# EAGLE board motion_sensor (EAGLE 6.5.0)
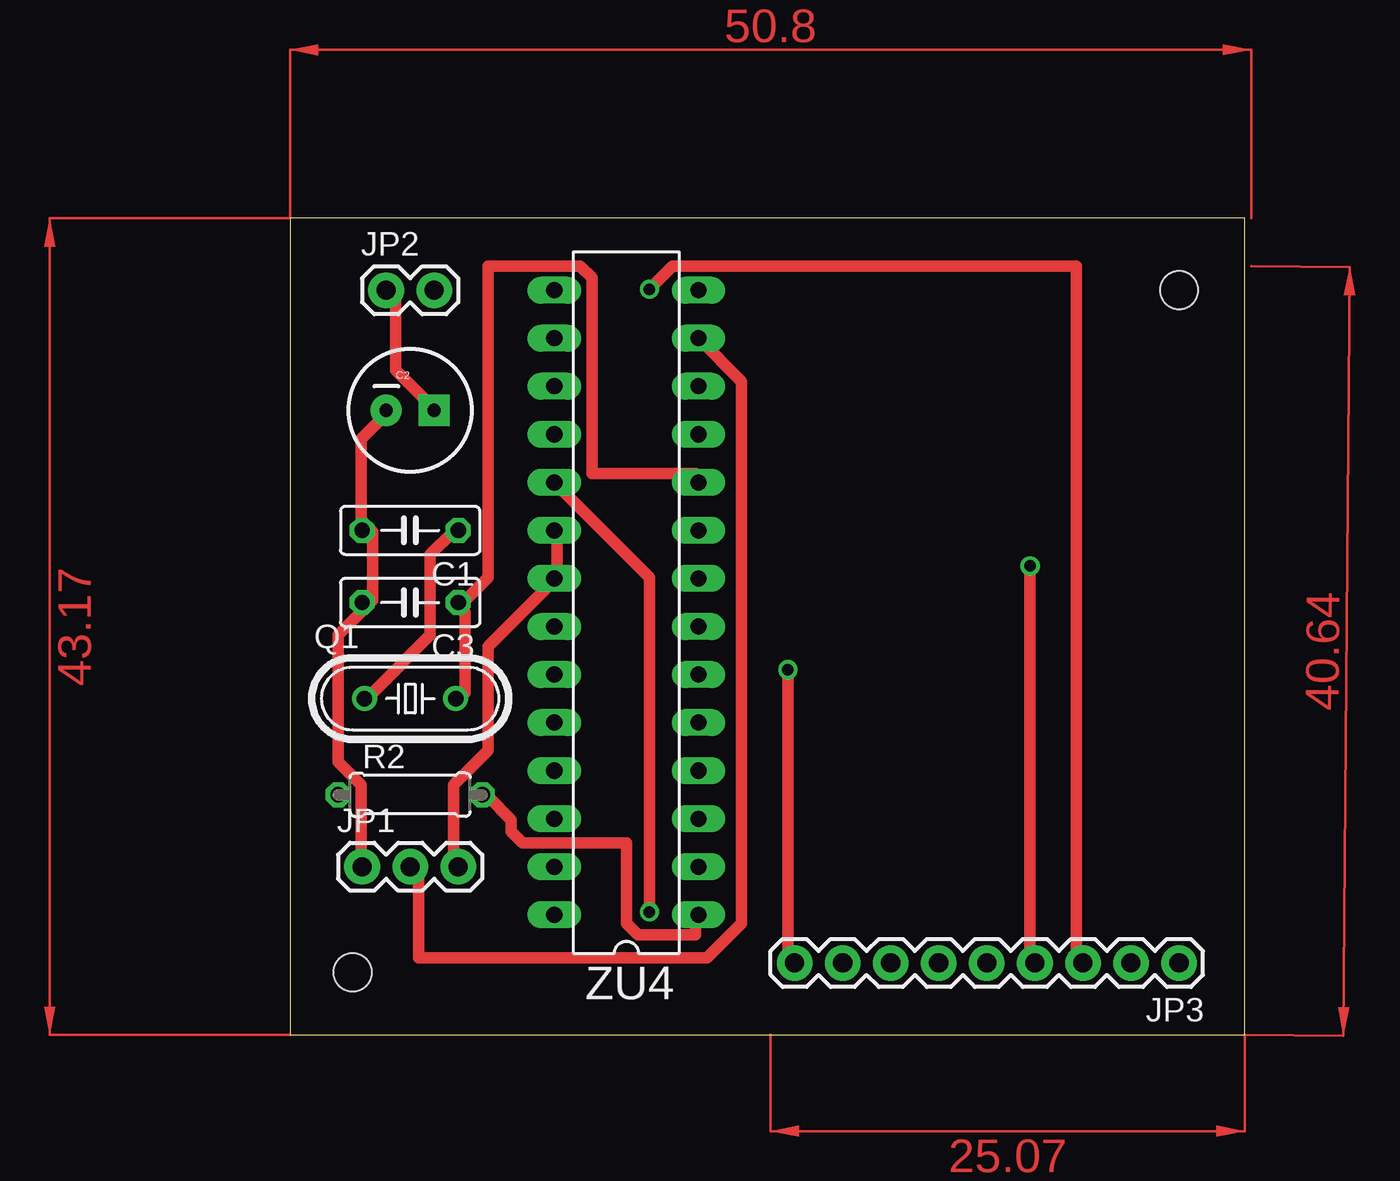
[diagram p0: board, top side]
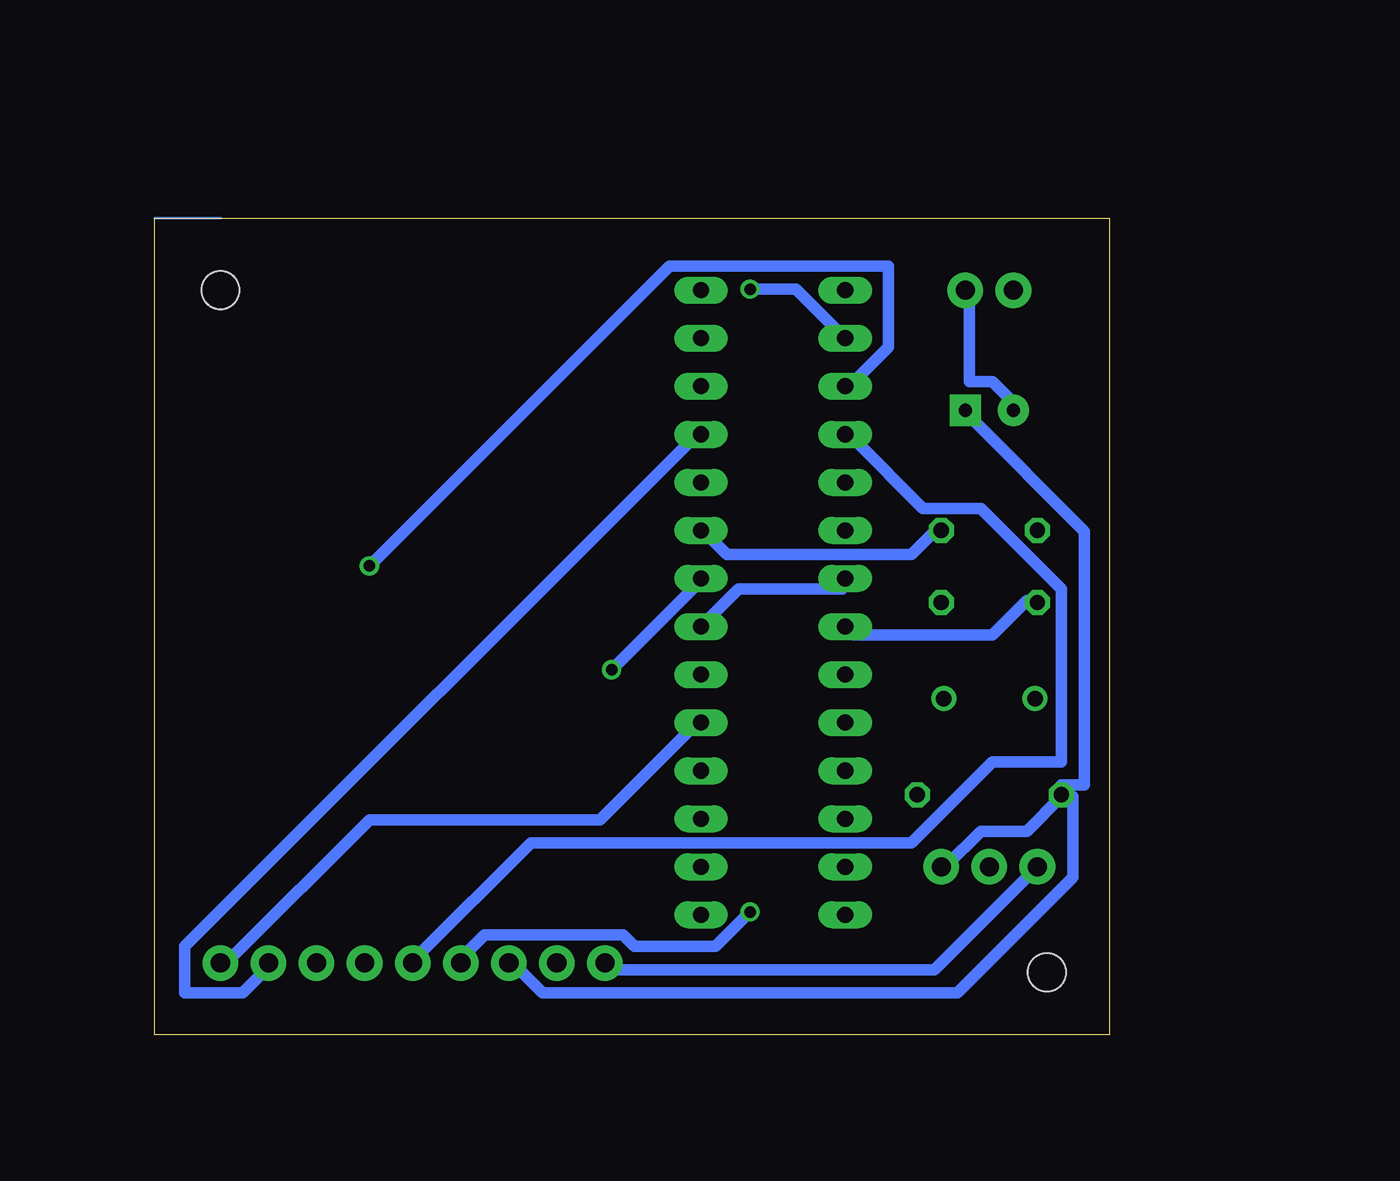
[diagram p1: board, bottom side, seen from below]

Size 50.47 x 43.17 mm. Coordinates in mm from the lower left corner, seen from the top.
Outline: 0,0 50.47,0 50.47,43.17 0,43.17 0,0
Copper layers (1*16): Top 0.035mm / dielectric 1.5mm / Bottom 0.035mm
Design rules "default *": minimum track width 24mil, minimum drill 24mil, track to track 10mil, track to pad 8mil, pad to pad 8mil, via to via 8mil, smd to smd 8mil, copper to edge 40mil, drill to drill 8mil, minimum pad ring 10mil, minimum via ring 8mil, stop-mask expansion 4mil, vias tented up to drill 0mil, thermal gap 10mil
Net classes: 0 default: width 0.152 mm, clearance 0.152 mm; 1 power: width 0.61 mm, drill 0.61 mm, clearance 0.254 mm; 2 gnd: width 0.203 mm, drill 0.559 mm, clearance 0.152 mm; 3 usbvcc: width 0.203 mm, drill 0.61 mm, clearance 0.152 mm; 4 aref: width 0.406 mm, drill 0.61 mm, clearance 0.254 mm
Holes 2 mm at 46.99,39.37 3.31,3.31

## Footprints (pad centres in the part's own frame; a part is rotated, then mirrored left to right if it is on the bottom)
C050-025X075 = drill 0.813 octagon: 1 -2.54,0; 2 2.54,0
CPOL-RADIAL-100UF-25V = drill 0.7 pad 1.651 square: 1 1.27,0 | drill 0.7 pad 1.651: 2 -1.27,0
1X03 = drill 1.016 pad 1.88: 1 0,0; 2 2.54,0; 3 5.08,0
1X02 = drill 1.016 pad 1.88: 1 0,0; 2 2.54,0
1X09 = drill 1.016 pad 1.88: 1 0,0; 2 2.54,0; 3 5.08,0; 4 7.62,0; 5 10.16,0; 6 12.7,0; 7 15.24,0; 8 17.78,0; 9 20.32,0
HC49/S = drill 0.813: 1 -2.413,0; 2 2.413,0
0207/7 = drill 0.813 octagon: 1 -3.81,0; 2 3.81,0
DIL28-3 = drill 0.85 pad 1.422 long: 1 -16.51,-3.81; 2 -13.97,-3.81; 3 -11.43,-3.81; 4 -8.89,-3.81; 5 -6.35,-3.81; 6 -3.81,-3.81; 7 -1.27,-3.81; 8 1.27,-3.81; 9 3.81,-3.81; 10 6.35,-3.81; 11 8.89,-3.81; 12 11.43,-3.81; 13 13.97,-3.81; 14 16.51,-3.81; 15 16.51,3.81; 16 13.97,3.81; 17 11.43,3.81; 18 8.89,3.81; 19 6.35,3.81; 20 3.81,3.81; 21 1.27,3.81; 22 -1.27,3.81; 23 -3.81,3.81; 24 -6.35,3.81; 25 -8.89,3.81; 26 -11.43,3.81; 27 -13.97,3.81; 28 -16.51,3.81

## Placement (x,y rotation side)
C1  22p  [C050-025X075]  6.35,26.67 180 top
C2  [CPOL-RADIAL-100UF-25V]  6.35,33.02 0 top
C3  22p  [C050-025X075]  6.35,22.86 180 top
JP1  SENSOR  [1X03]  3.81,8.89 0 top
JP2  POWER  [1X02]  5.08,39.37 0 top
JP3  M09  [1X09]  46.99,3.81 180 top
Q1  [HC49/S]  6.35,17.78 0 top
R2  10K  [0207/7]  6.35,12.7 0 top
ZU4  ATMEGA328P-PU  [DIL28-3]  17.78,22.86 90 top

## Library data of the parts
C1 C3 R2 = resistor
C2 = SparkFun-Passives
JP1-JP3 = SparkFun-Connectors
Q1 = crystal; OC_FARNELL: 1667008; OC_NEWARK: unknown
ZU4 = SmartPrj

## Nets
GND [gnd]: C1.2 C2.2 C3.2 JP1.1 JP2.2 JP3.9 ZU4.8 ZU4.22
N$1: JP3.2 ZU4.11
N$2: JP3.1 ZU4.5
N$3: R2.2 ZU4.1
N$4: C1.1 Q1.1 ZU4.9
N$5: JP3.6 ZU4.19
N$6: JP3.3 ZU4.16
N$19: JP3.5 ZU4.18
N$20: JP3.4 ZU4.17
N$26: JP1.2 ZU4.13
VCC [usbvcc]: C2.1 JP1.3 JP2.1 JP3.7 R2.1 ZU4.7 ZU4.20 ZU4.21
XTAL2: C3.1 Q1.2 ZU4.10

## Tracks (layer width: path | path; a pad name or v marks a point on that pad's centre or on a via)
GND  (via drill 0.61)
  Top 0.61: C2.2 4.98,32.72 3.76,31.5 3.76,27.23 C1.2 4.37,26.62 4.37,22.96 C3.2 3.76,22.35 2.54,21.13 2.54,14.43 3.76,13.21 3.76,8.94 JP1.1 | v26.31,19.3 26.31,4.06 JP3.9
  Bottom 0.61: ZU4.22 13.51,21.13 6.2,21.13 4.37,22.96 C3.2 | JP2.2 7.42,38.81 7.42,34.54 6.2,34.54 4.98,33.33 C2.2 | v26.31,19.3 22.05,23.57 ZU4.8 | JP1.1 9.25,3.45 26.31,3.45 JP3.9
N$1
  Bottom 0.61: ZU4.11 22.05,31.5 48.87,4.67 48.87,2.23 45.82,2.23 44.6,3.45 JP3.2
N$2
  Bottom 0.61: ZU4.5 22.05,16.26 26.92,11.38 39.12,11.38 46.43,4.06 JP3.1
N$3
  Top 0.61: R2.2 10.46,12.6 11.68,11.38 11.68,10.77 12.29,10.16 17.78,10.16 17.78,5.89 18.39,5.28 21.44,5.28 21.44,5.89 ZU4.1
N$4
  Top 0.61: Q1.1 4.37,18.09 7.42,21.13 7.42,25.4 8.64,26.62 C1.1
  Bottom 0.61: ZU4.9 21.44,26.62 20.22,25.4 10.46,25.4 9.25,26.62 C1.1
N$5  (via drill 0.61)
  Top 0.61: ZU4.19 19,24.18 v19,6.5
  Bottom 0.61: v19,6.5 20.83,4.67 25.09,4.67 25.7,5.28 33.02,5.28 34.24,4.06 JP3.6
N$6  (via drill 0.61)
  Top 0.61: v19,39.42 20.22,40.64 41.55,40.64 41.55,4.06 JP3.3
  Bottom 0.61: ZU4.16 16.56,39.42 v19,39.42
N$19
  Bottom 0.61: ZU4.18 13.51,31.5 9.86,27.84 6.81,27.84 2.54,23.57 2.54,14.43 6.2,14.43 10.46,10.16 30.58,10.16 36.68,4.06 JP3.5
N$20  (via drill 0.61)
  Top 0.61: v39.12,24.79 39.12,4.06 JP3.4
  Bottom 0.61: v39.12,24.79 23.27,40.64 11.68,40.64 11.68,36.37 13.51,34.54 ZU4.17
N$26
  Top 0.61: ZU4.13 23.88,34.54 23.88,5.89 22.05,4.06 6.81,4.06 6.81,8.33 JP1.2
VCC
  Top 0.61: ZU4.20 14.12,26.62 14.12,24.18 ZU4.21 13.51,23.57 10.46,20.52 10.46,15.04 8.64,13.21 8.64,8.94 JP1.3 | C2.1 7.42,33.33 5.59,35.15 5.59,38.81 JP2.1
  Bottom 0.61: ZU4.7 19.61,23.57 14.12,23.57 ZU4.21 | 2.54,12.6 4.37,10.77 6.81,10.77 8.64,8.94 JP1.3 | 2.54,12.6 1.93,12.6 1.93,8.33 8.03,2.23 29.97,2.23 31.19,3.45 JP3.7 | 2.54,12.6 R2.1 2.54,13.21 1.32,13.21 1.32,26.62 7.42,32.72 C2.1
XTAL2
  Top 0.61: Q1.2 9.25,18.09 9.25,22.35 C3.1 9.25,22.96 10.46,24.18 10.46,40.64 15.34,40.64 15.95,40.03 15.95,29.67 21.44,29.67 ZU4.10
(copper drawn outside any net)
  shapes: Bottom area x1, Top area x4